# Altium PCB PCB2.PcbDoc
Units mm, origin at the board's own origin, x right, y up, seen from the top; angles counter-clockwise.
Board outline 100 x 100 mm, 2 copper layers (Top Layer, Bottom Layer); 11 components, 17 nets, 95 pads, 0 vias.
Unrouted connection lines stored in the file: 52.
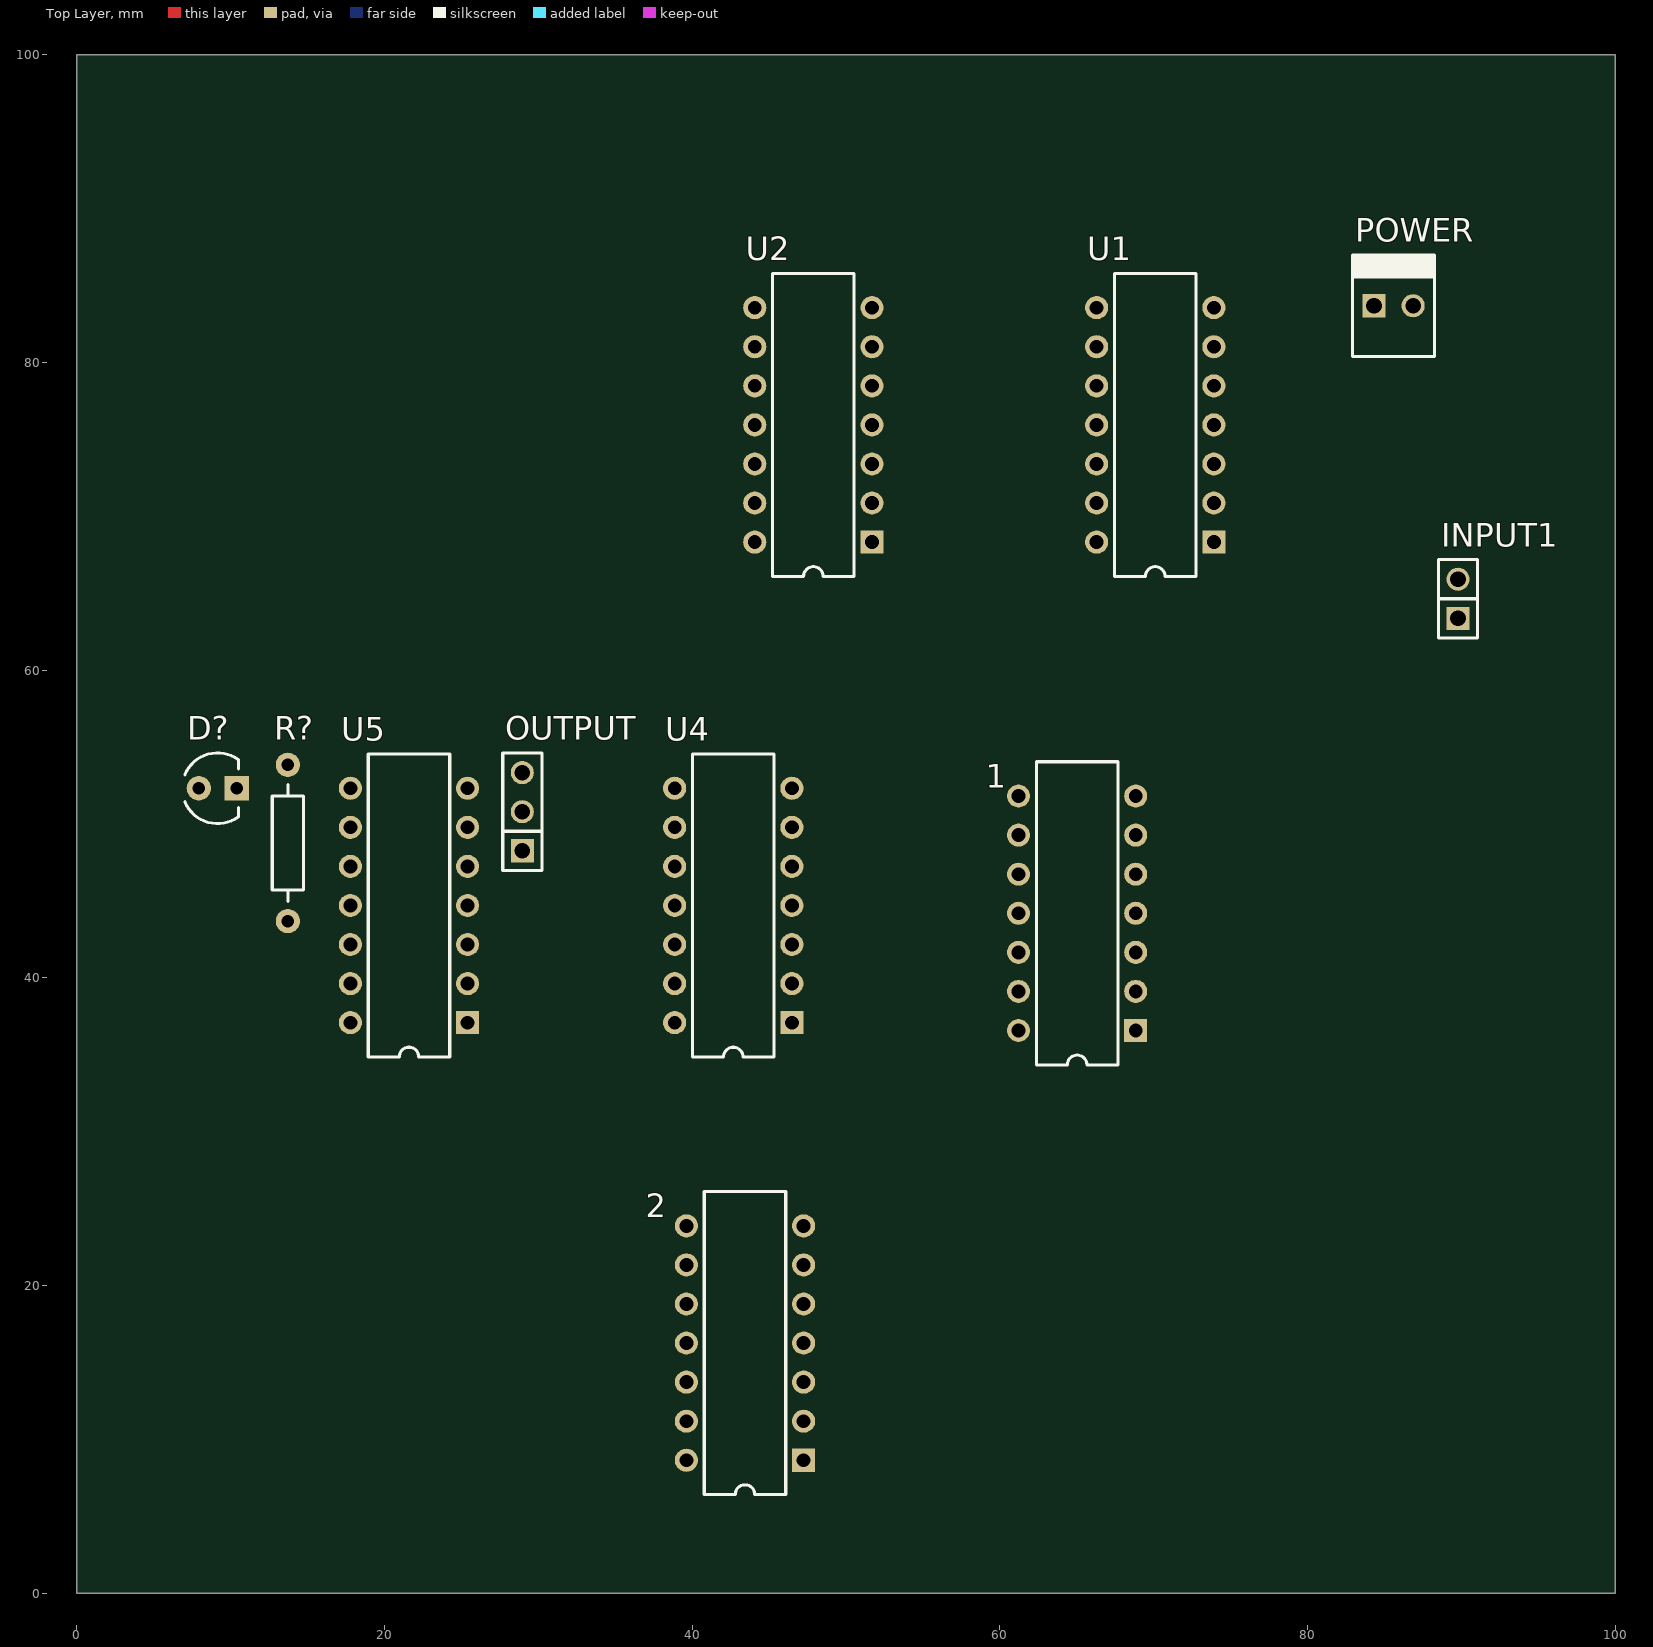
[diagram p0: Top Layer view]
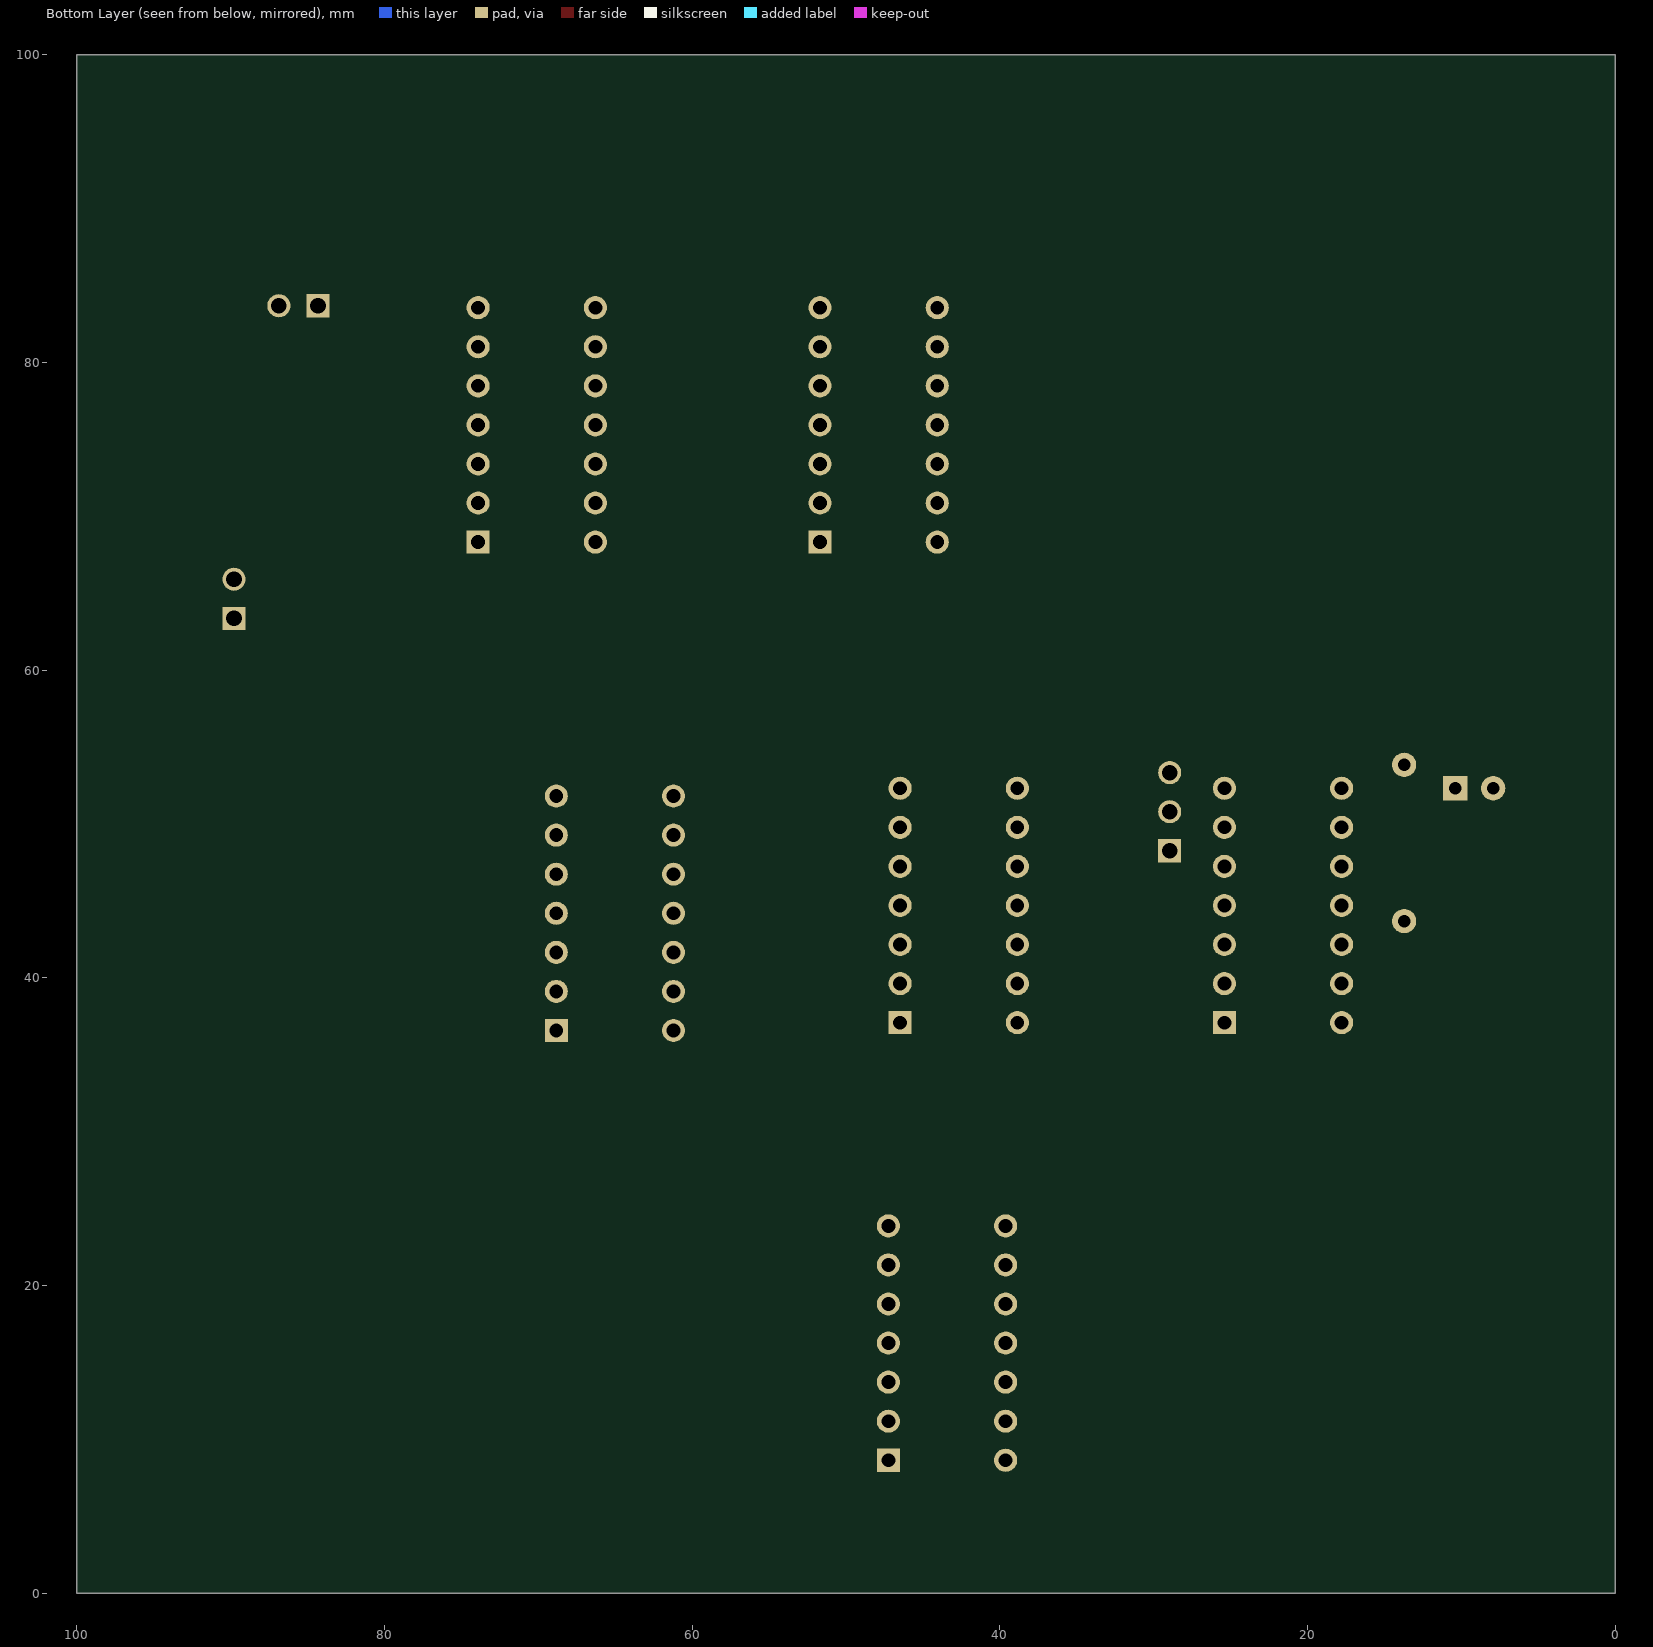
[diagram p1: Bottom Layer view, seen from below]

## Layer stack, top to bottom
Top Solder: solder mask 0.0102, Solder Resist, Dk 3.5
Top Layer: signal copper 0.0356
Dielectric 1: dielectric 0.32, FR-4, Dk 4.8
Bottom Layer: signal copper 0.0356
Bottom Solder: solder mask 0.0102, Solder Resist, Dk 3.5

## Board outline
0,0 100,0 100,100 0,100

## Design rules (kind name [scope] priority, off if disabled: settings)
Clearance [All] p1: gap=0.4 ignorepadtopadclearanceinfootprint=FALSE
PolygonConnect [All] p1: connectstyle=Relief reliefconductorwidth=0.254 reliefentries=4 polygonreliefangle="90 Angle" airgapwidth=0.254
RoutingVias [All] p1: holewidth=0.4 width=2 viastyle="Through Hole" minholewidth=0.3 minwidth=1.5 maxholewidth=0.5 maxwidth=2.1
SolderMaskExpansion [All] p1: expansion=0.102
Width [All] p1: maxlimit=0.6 minlimit=0.4 preferedwidth=0.5
30 further rules are at their usual default settings.

## Components (designator, comment, footprint, x,y, rotation, side; value= is the part's Value field where it differs from the comment)
1 "SN74HC11N" N014 65.024,44.196 r90 top
2 "SN74HC11N" N014 43.434,16.256 r90 top
D? "LED" LED3 9.144,52.324 r0 top
INPUT1 "CON2" SIP2 89.789,64.643 r90 top
OUTPUT "CON3" SIP3 28.956,50.8 r90 top
POWER "MOLEX2" MOLEX2 84.328,83.693 r0 top
R? "RES" RES400 13.716,43.688 r90 top
U1 "SN74HCT04N" N014 70.104,75.946 r90 top
U2 "SN74HC4075N" N014 47.879,75.946 r90 top
U4 "SN74LS74AN" N014D 42.672,44.704 r90 top
U5 "SN74LS74AN" N014D 21.59,44.704 r90 top

## Footprints (in the part's own frame and the unit in brackets; to place one, negate y for a bottom-side part, rotate by r counter-clockwise, add the part's x,y. Pads: shape width x height; smd on the part's side, far side on the other; paste and mask are expansions set on the pad)
LED3 [mil]
  round 62 hole 32: 1(-48,0)
  rect 62x62 hole 32: 2(49,0)
  silkscreen extent -84,-90 54,90, body extent -65,-64 65,65, height 19
MOLEX2 [mm]
  rect 1.5x1.5 hole 1.016: 1(0,0)
  round 1.5 hole 1.016: 2(2.54,0)
  silkscreen extent -1.4,-3.3 3.94,3.3, body extent -1.27,-3.17 3.81,3.17, height 10.74
N014 [mm] "DIP; 14 Leads; Row Spacing 7.62 mm; Pitch 2.54 mm"
  rect 1.5x1.5 hole 0.9: 1(-7.62,-3.81)
  round 1.5 hole 0.9: 2(-5.08,-3.81) 3(-2.54,-3.81) 4(0,-3.81) 5(2.54,-3.81) 6(5.08,-3.81) 7(7.62,-3.81) 8(7.62,3.81) 9(5.08,3.81) 10(2.54,3.81) 11(0,3.81) 12(-2.54,3.81) 13(-5.08,3.81) 14(-7.62,3.81)
  silkscreen extent -9.85,-2.65 9.85,2.65
N014D [mm] "DIP; 14 Leads; Row Spacing 7.62 mm; Pitch 2.54 mm"
  rect 1.5x1.5 hole 0.9: 1(-7.62,-3.81)
  round 1.5 hole 0.9: 2(-5.08,-3.81) 3(-2.54,-3.81) 4(0,-3.81) 5(2.54,-3.81) 6(5.08,-3.81) 7(7.62,-3.81) 8(7.62,3.81) 9(5.08,3.81) 10(2.54,3.81) 11(0,3.81) 12(-2.54,3.81) 13(-5.08,3.81) 14(-7.62,3.81)
  silkscreen extent -9.85,-2.65 9.85,2.65
RES400 [mil]
  round 62 hole 32: 1(0,0) 2(400,0)
  silkscreen extent 50,-40 350,40, body extent -12,-45 412,46, height 96
SIP2 [mm]
  rect 1.5x1.5 hole 1.016: 1(-1.27,0)
  round 1.5 hole 1.016: 2(1.27,0)
  silkscreen extent -2.54,-1.27 2.54,1.27
SIP3 [mm]
  rect 1.5x1.5 hole 1.016: 1(-2.54,0)
  round 1.5 hole 1.016: 2(0,0) 3(2.54,0)
  silkscreen extent -3.81,-1.27 3.81,1.27, body extent -3.81,-1.3 3.81,1.24, height 8.38

## Part data
1 2: "Triple 3-Input Positive-AND Gate", ComponentLink1Description="Manufacturer Link", ComponentLink1URL=http://www.ti.com/, ComponentLink2Description=Datasheet, ComponentLink2URL=http://www-s.ti.com/sc/ds/SN74HC11.pdf, DatasheetVersion=May-1997, LatestRevisionDate=04-Mar-2005, LatestRevisionNote="Stylized 3D Model Added.", PackageDescription="DIP; 14 Leads; Row Spacing 7.62 mm; Pitch 2.54 mm", PackageReference=N014, PackageVersion=Oct-1995, Published=8-Jun-2000, Publisher="Altium Limited"
U1: "Hex Inverter", ComponentLink1Description="Manufacturer Link", ComponentLink1URL=http://www.ti.com/, ComponentLink2Description=Datasheet, ComponentLink2URL=http://www-s.ti.com/sc/ds/SN54HCT04.pdf, DatasheetVersion=May-1997, LatestRevisionDate=04-Mar-2005, LatestRevisionNote="Stylized 3D Model Added.", PackageDescription="DIP; 14 Leads; Row Spacing 7.62 mm; Pitch 2.54 mm", PackageReference=N014, PackageVersion=Oct-1995, Published=8-Jun-2000, Publisher="Altium Limited"
U2: "Triple 3-Input Positive-OR Gate", ComponentLink1Description="Manufacturer Link", ComponentLink1URL=http://www.ti.com/, ComponentLink2Description=Datasheet, ComponentLink2URL=http://www-s.ti.com/sc/ds/sn74hc4075.pdf, DatasheetVersion=Sep-1987, LatestRevisionDate=04-Mar-2005, LatestRevisionNote="Stylized 3D Model Added.", PackageDescription="DIP; 14 Leads; Row Spacing 7.62 mm; Pitch 2.54 mm", PackageReference=N014, PackageVersion=Oct-1995, Published=8-Jun-2000, Publisher="Altium Limited"
U4 U5: "Dual D-Type Positive-Edge-Triggered Flip-Flop with Preset and Clear", ComponentLink1Description="Manufacturer Link", ComponentLink1URL=http://www.ti.com/, ComponentLink2Description=Datasheet, ComponentLink2URL=http://www-s.ti.com/sc/ds/sn74ls74a.pdf, DatasheetVersion=Mar-1988, LatestRevisionDate=04-Mar-2005, LatestRevisionNote="Stylized 3D Model Added.", PackageDescription="DIP; 14 Leads; Row Spacing 7.62 mm; Pitch 2.54 mm", PackageReference=N014D, PackageVersion=Oct-1995, Published=8-Jun-2000, Publisher="Altium Limited"

## Nets (pads, with @x,y where several pads share a name; then routed paths per layer and width w, separated by ;. In a path a pad name is that pad's centre, name@x,y a point inside that pad or via, vN(x,y) a via of type N, cw(c..) or ccw(c..) an arc to the next point about the centre after c; other vN are vias at no path point)
Clock: INPUT1.1 U4.3 U4.11 U5.3
GND: 1.7 2.7 D?.2 POWER.2 U1.7 U2.5 U2.7 U4.7 U5.7
Net1_6: 1.6 U2.1 U2.3
Net1_8: 1.8 2.1
Net2_6: 2.6 U2.2
Net2_8: 2.8 U2.8
Net2_12: 2.12 U2.4
NetD?_1: D?.1 R?.1
VCC: 1.14 2.11 2.13 2.14 POWER.1 U1.14 U2.14 U4.14 U5.14
W: 1.11 1.13 2.3 2.10 INPUT1.2 U1.1
Wneg: 1.3 U1.2
Y1: 1.1 2.5 OUTPUT.1 U2.6 U4.2 U4.5
y1neg: 1.5 1.9 U4.6
Y2: 1.2 1.4 OUTPUT.2 U2.9 U4.9 U4.12
y2neg: 1.10 2.4 U4.8
Y3: 1.12 2.9 OUTPUT.3 R?.2 U5.2 U5.5
y3neg: 2.2 U5.6
pads on no net: U1.3 U1.4 U1.5 U1.6 U1.8 U1.9 U1.10 U1.11 U1.12 U1.13 U2.10 U2.11 U2.12 U2.13 U4.1 U4.4 U4.10 U4.13 U5.1 U5.4 U5.8 U5.9 U5.10 U5.11 U5.12 U5.13